# Altium PCB serverboard.PcbDoc
Units mil, origin at the board's own origin, x right, y up, seen from the top; angles counter-clockwise.
Board outline 2747.83 x 1810.01 mil, 2 copper layers (Top Layer, Bottom Layer); 15 components, 24 nets, 70 pads, 10 vias.
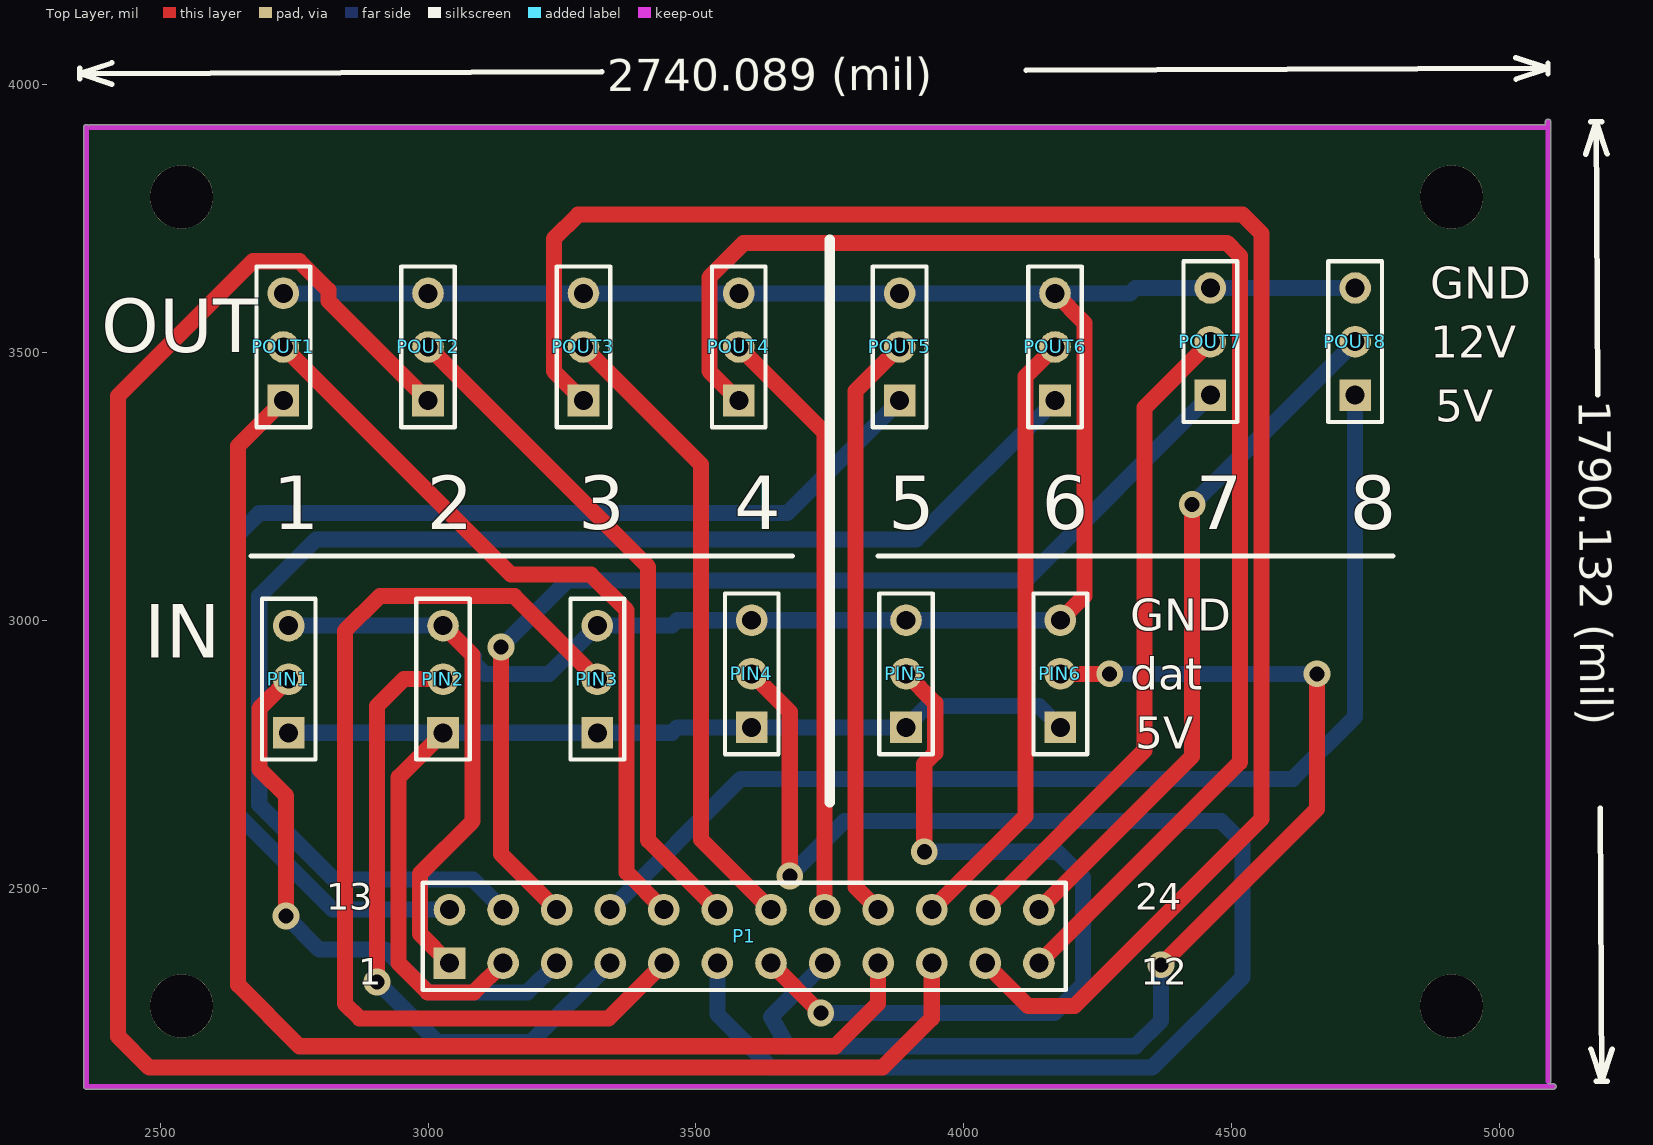
[diagram p0: Top Layer view]
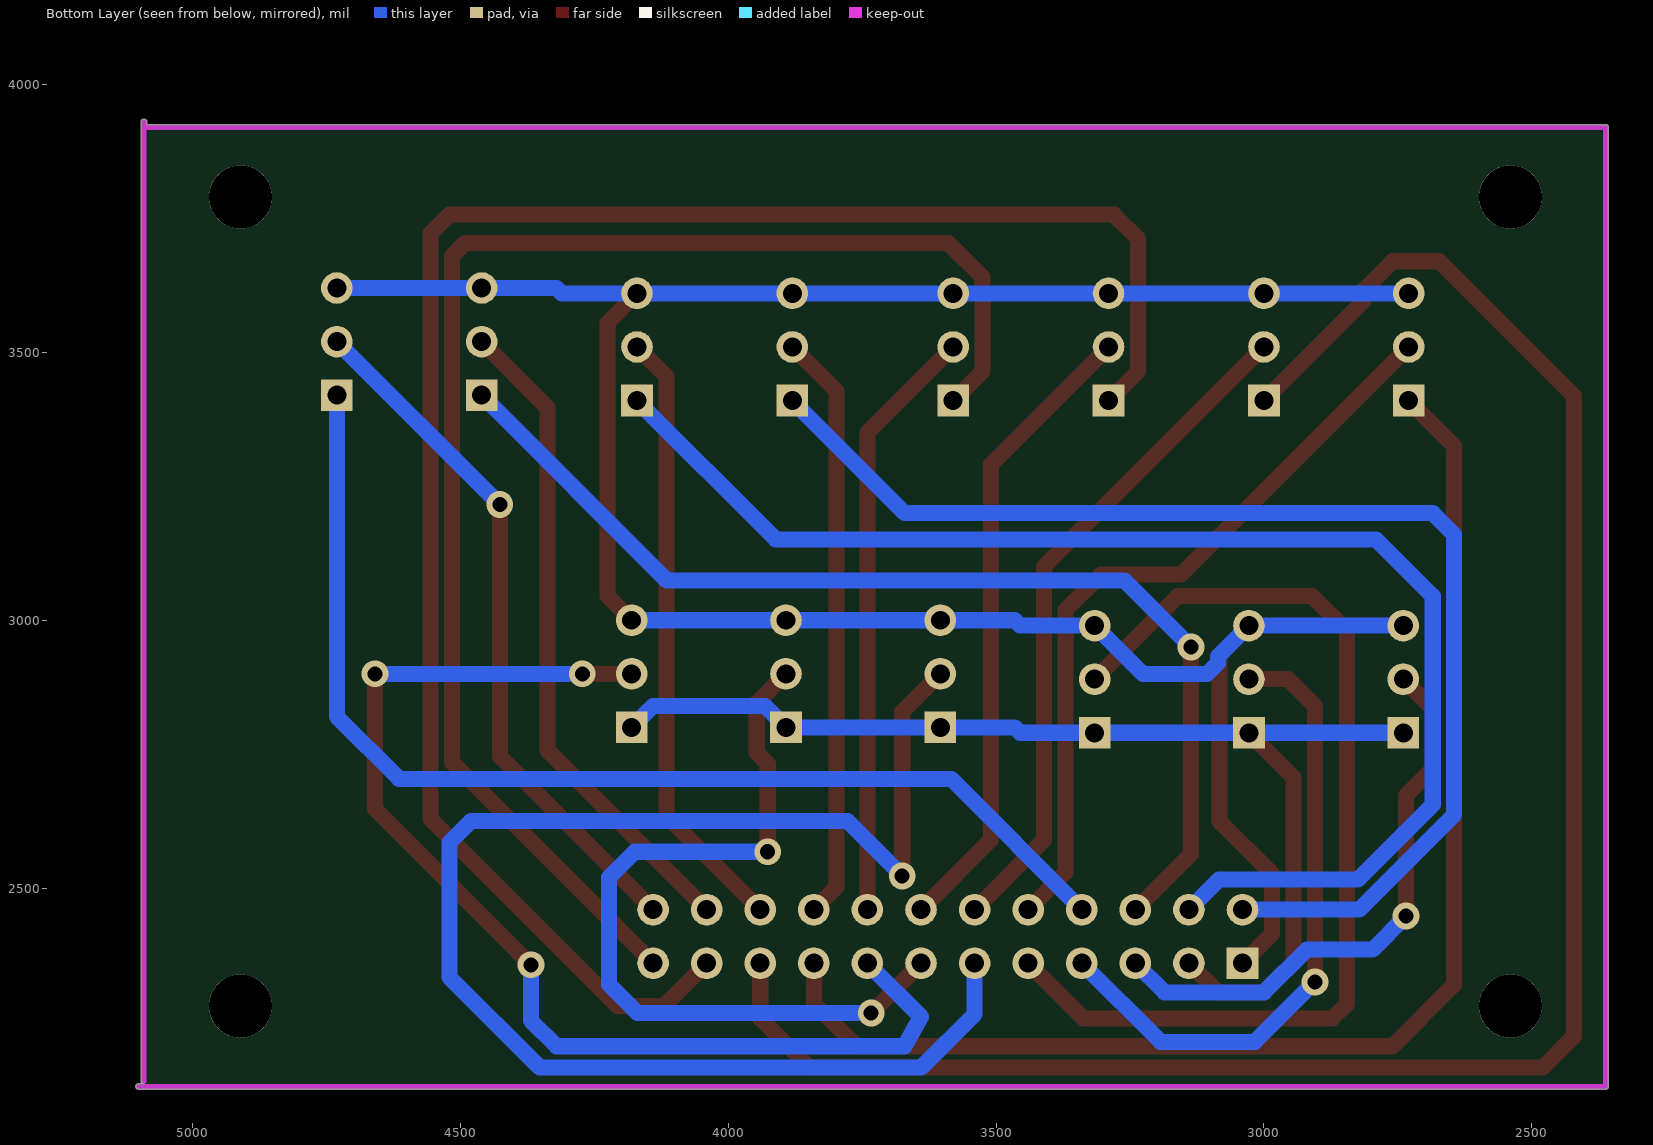
[diagram p1: Bottom Layer view, seen from below]

## Layer stack, top to bottom
Top Layer: signal copper 1.4
Dielectric: dielectric 12.6, FR-4, Dk 4.8
Bottom Layer: signal copper 1.4

## Board outline
2357.19,2130 2357.19,3920 cw(c2362.2,3920) 2366.1,3923.16 cw(c2370,3920) 2370,3925.01 5084.98,3925.01 5084.98,3930 cw(c5090,3930) 5095.02,3930 5095.02,2140 cw(c5090,2140) 5090.55,2135.01 5100,2135.01 cw(c5100,2130) 5105.02,2130 cw(c5100,2130) 5100,2124.99 2362.2,2124.99 cw(c2362.2,2130)

## Design rules (kind name [scope] priority, off if disabled: settings)
Clearance [All] p1: gap=10
PolygonConnect [All] p1: connectstyle=Relief reliefconductorwidth=10 reliefentries=4 polygonreliefangle="90 Angle"
RoutingVias [All] p1: holewidth=28 width=50 viastyle="Through Hole" minholewidth=28 minwidth=50 maxholewidth=28 maxwidth=50
SilkscreenOverComponentPads [All] p1: minsilkscreentomaskgap=10
SolderMaskExpansion [All] p1: expansion=4
Width [All] p1: maxlimit=30 minlimit=10 preferedwidth=30
27 further rules are at their usual default settings.

## Components (designator, comment, footprint, x,y, rotation, side; value= is the part's Value field where it differs from the comment)
P1 "Header 12X2A" HDR2X12_CEN 3040,2360 r0 top
PIN1 "Header 3" HDR1X3 2740,2790 r90 top
PIN2 "Header 3" HDR1X3 3028,2790 r90 top
PIN3 "Header 3" HDR1X3 3316,2790 r90 top
PIN4 "Header 3" HDR1X3 3604,2800 r90 top
PIN5 "Header 3" HDR1X3 3892,2800 r90 top
PIN6 "Header 3" HDR1X3 4180,2800 r90 top
POUT1 "Header 3" HDR1X3 2730,3410 r90 top
POUT2 "Header 3" HDR1X3 3000,3410 r90 top
POUT3 "Header 3" HDR1X3 3290,3410 r90 top
POUT4 "Header 3" HDR1X3 3580,3410 r90 top
POUT5 "Header 3" HDR1X3 3880,3410 r90 top
POUT6 "Header 3" HDR1X3 4170,3410 r90 top
POUT7 "Header 3" HDR1X3 4460,3420 r90 top
POUT8 "Header 3" HDR1X3 4730,3420 r90 top

## Footprints (in the part's own frame and the unit in brackets; to place one, negate y for a bottom-side part, rotate by r counter-clockwise, add the part's x,y. Pads: shape width x height; smd on the part's side, far side on the other; paste and mask are expansions set on the pad)
HDR1X3 [mm] "Connector; Header; 3 Position"
  rect 1.5x1.5 hole 0.9: 1(0,0)
  round 1.5 hole 0.9: 2(2.54,0) 3(5.08,0)
  silkscreen extent -1.27,-1.27 6.35,1.27
HDR2X12_CEN [mm] "Connector; Header; 12x2 Position"
  rect 1.5x1.5 hole 0.9: 1(0,0)
  round 1.5 hole 0.9: 2(2.54,0) 3(5.08,0) 4(7.62,0) 5(10.16,0) 6(12.7,0) 7(15.24,0) 8(17.78,0) 9(20.32,0) 10(22.86,0) 11(25.4,0) 12(27.94,0) 13(0,2.54) 14(2.54,2.54) 15(5.08,2.54) 16(7.62,2.54) 17(10.16,2.54) 18(12.7,2.54) 19(15.24,2.54) 20(17.78,2.54) 21(20.32,2.54) 22(22.86,2.54) 23(25.4,2.54) 24(27.94,2.54)
  silkscreen extent -1.27,-1.27 29.21,3.81

## Part data
P1: "Header, 12-Pin, Dual row"
PIN1 PIN2 PIN3 PIN4 PIN5 PIN6 POUT1 POUT2 POUT3 POUT4 POUT5 POUT6 POUT7 POUT8: "Header, 3-Pin"

## Free pads (board coordinates)
  round 118.11 hole 118.11: 0(4910,3790) 1(2540,2280) 2(4910,2280) 3(2540,3790)

## Via types
v1: diameter 50, hole 28, Top Layer to Bottom Layer, 10 vias

## Nets (pads, with @x,y where several pads share a name; then routed paths per layer and width w, separated by ;. In a path a pad name is that pad's centre, name@x,y a point inside that pad or via, vN(x,y) a via of type N, cw(c..) or ccw(c..) an arc to the next point about the centre after c; other vN are vias at no path point)
+5: P1.2 PIN1.1 PIN2.1 PIN3.1 PIN4.1 PIN5.1 PIN6.1 | length 2181.8
  Top Layer w30: PIN2.1 2945,2707 2945,2360 2999.53,2305.47 3085.47,2305.47 P1.2
  Bottom Layer w30: PIN1.1 PIN2.1 PIN3.1 3455,2790 3465,2800 PIN4.1 PIN5.1 3932,2840 4140,2840 PIN6.1
GND: P1.1 PIN1.3 PIN2.3 PIN3.3 PIN4.3 PIN5.3 PIN6.3 POUT1.3 POUT2.3 POUT3.3 POUT4.3 POUT5.3 POUT6.3 POUT7.3 POUT8.3 | length 4897.4
  Top Layer w30: PIN2.3 3083,2935 3083,2625 2985,2527 2985,2415 P1.1 ; POUT6.3 4225,3555 4225,3045 PIN6.3
  Bottom Layer w30: POUT1.3 POUT2.3 POUT3.3 POUT4.3 POUT5.3 POUT6.3 4310,3610 4320,3620 POUT7.3 POUT8.3 ; PIN1.3 PIN2.3 3086,2932 3086,2920 3106,2900 3226,2900 PIN3.3 3455,2990 3465,3000 PIN4.3 PIN5.3 PIN6.3
HOUT1: P1.17 POUT1.2 | length 1431.4
  Top Layer w30: POUT1.2 3155,3085 3304,3085 3370.53,3018.47 3370.53,2529.47 P1.17
HOUT2: P1.18 POUT2.2 | length 1273.7
  Top Layer w30: POUT2.2 3410.53,3099.47 3410.53,2589.47 P1.18
HOUT3: P1.19 POUT3.2 | length 1195
  Top Layer w30: POUT3.2 3509.11,3290.89 3509.11,2590.89 P1.19
HOUT4: P1.20 POUT4.2 | length 1116.3
  Top Layer w30: POUT4.2 3740,3350 P1.20
HOUT5: P1.21 POUT5.2 | length 1101.8
  Top Layer w30: P1.21 3797.47,2502.53 3797.47,3427.47 POUT5.2
HOUT6: P1.22 POUT6.2 | length 1145.3
  Top Layer w30: P1.22 4115,2635 4115,3455 POUT6.2
HOUT7: P1.23 POUT7.2 | length 1234
  Top Layer w30: P1.23 4337,2757 4337,3397 POUT7.2
HOUT8: P1.24 POUT8.2 | length 1304.4
  Top Layer w30: P1.24 4426,2746 v1(4426,3216)
  Bottom Layer w30: v1(4426,3216) POUT8.2
IN1: P1.3 PIN1.2 | length 1071.7
  Top Layer w30: v1(2735,2448) 2735,2672.47 2685.47,2722 2685.47,2835.47 PIN1.2
  Bottom Layer w30: v1(2735,2448) 2797.44,2385.56 2919.91,2385.56 3000,2305.47 3185.47,2305.47 P1.3
IN2: P1.4 PIN2.2 | length 1201
  Top Layer w30: v1(2905,2325) 2905,2840 2955,2890 PIN2.2
  Bottom Layer w30: v1(2905,2325) 3017,2213 3193,2213 P1.4
IN3: P1.5 PIN3.2 | length 1906.8
  Top Layer w30: PIN3.2 3161,3045 2910,3045 2845,2980 2845,2284.37 2872.37,2257 3337,2257 P1.5
IN4: P1.6 PIN4.2 | length 2747.7
  Top Layer w30: PIN4.2 3675,2829 v1(3675,2523)
  Bottom Layer w30: P1.6 3540,2265 3640,2165 4351,2165 4520,2334 4520,2585 4480,2625 3777,2625 v1(3675,2523)
IN5: P1.7 PIN5.2 | length 1521.4
  Top Layer w30: P1.7 v1(3733,2267) ; PIN5.2 3946.53,2845.47 3946.53,2752.53 3926,2732 v1(3926,2568)
  Bottom Layer w30: v1(3733,2267) 4169,2267 4222,2320 4222,2520 4174,2568 v1(3926,2568)
IN6: P1.8 PIN6.2 | length 2168
  Top Layer w30: PIN6.2 v1(4272,2900) ; v1(4368,2357) 4659,2648 v1(4659,2900)
  Bottom Layer w30: P1.8 3640,2260 3671,2205 4320,2205 4368,2253 v1(4368,2357) ; v1(4272,2900) v1(4659,2900)
LOUT1: P1.9 POUT1.1 | length 2475.6
  Top Layer w30: POUT1.1 2645.47,3325.47 2645.47,2319.53 2760,2205 3760,2205 3840,2285 P1.9
LOUT2: P1.10 POUT2.1 | length 3680.7
  Top Layer w30: POUT2.1 2814,3596 2814,3616 2760,3670 2673,3670 2421.77,3418.77 2421.77,2223.23 2480,2165 3848,2165 3940,2257 P1.10
LOUT3: P1.11 POUT3.1 | length 3463.6
  Top Layer w30: POUT3.1 3235,3465 3235,3712 3280,3757 4520,3757 4555,3722 4555,2629 4206,2280 4120,2280 P1.11
LOUT4: P1.12 POUT4.1 | length 2754.6
  Top Layer w30: POUT4.1 3525,3465 3525,3640 3589,3704 4491,3704 4515,3680 4515,2735 P1.12
LOUT5: P1.13 POUT5.1 | length 2329.7
  Bottom Layer w30: P1.13 2822.24,2460 2645,2637.24 2645,3160 2685,3200 3670,3200 POUT5.1
LOUT6: P1.14 POUT6.1 | length 2561.4
  Bottom Layer w30: P1.14 3084,2516 2825,2516 2685,2656 2685,3045 2791,3151 3911,3151 POUT6.1
LOUT7: P1.15 POUT7.1 | length 2051.8
  Top Layer w30: v1(3136,2950) 3136,2564 P1.15
  Bottom Layer w30: v1(3136,2950) 3260,3074 4114,3074 POUT7.1
LOUT8: P1.16 POUT8.1 | length 2139.1
  Bottom Layer w30: P1.16 3584,2704 4614,2704 4730,2820 POUT8.1

## Keep-outs
Keep-Out Layer:
  lines w10: 2362.2,3920 2362.2,2130 5100,2130 ; 2370,3920 5090,3920 ; 5090,2140 5090,3930

## Silkscreen, mask and mechanical layers (free items; w line width, h text height)
Top Overlay:
  lines w10: 2349.96,4030 2350.04,4010 ; 2409.93,4040.22 2350,4020 ; 2410.07,4000.22 2350,4020 ; 2670,3120 3680,3120 ; 3324.16,4023.56 2350,4020 ; 3840,3120 4800,3120 ; 4115.91,4026.44 5090.07,4030 ; 5030,4049.78 5090.07,4030 ; 5030.14,4009.78 5090.07,4030 ; 5090.03,4040 5090.11,4020 ; 5160.35,3869.89 5180,3930 ; 5169.97,2199.78 5190.31,2139.9 ; 5170,3929.94 5190,3930.06 ; 5180.31,2139.84 5200.31,2139.95 ; 5182.93,3420.82 5180,3930 ; 5187.38,2649.07 5190.31,2139.9 ; 5200.35,3870.12 5180,3930 ; 5209.97,2200.01 5190.31,2139.9
  lines w19.68: 3750,2660 3750,3710
  text "2740.089 (mil)" at 3334.29,3987.6 h60 r0.21
  text "GND" at 4870,3600 h60
  text "OUT" at 2390,3500 h100
  text "12V" at 4870,3490 h60
  text "1790.132 (mil)" at 5147,3410.62 h60 r270.33
  text "5V" at 4880,3370 h60
  text "1" at 2710,3170 h100
  text "2" at 2997.14,3170 h100
  text "3" at 3280,3170 h100
  text "4" at 3571.43,3170 h100
  text "5" at 3858.57,3170 h100
  text "6" at 4145.71,3170 h100
  text "7" at 4432.86,3170 h100
  text "8" at 4720,3170 h100
  text "GND" at 4310,2980 h60
  text "IN" at 2470,2930 h100
  text "dat" at 4310,2870 h60
  text "5V" at 4320,2760 h60

## Text inside footprints (layer, text, board x,y; h text height)
P1: Top Overlay "1" at 2870,2320 h50; Top Overlay "13" at 2810,2460 h50; Top Overlay "12" at 4330,2320 h50; Top Overlay "24" at 4320,2460 h50